# Altium PCB Instigator2012.PcbDoc
Units mil, origin at the board's own origin, x right, y up, seen from the top; angles counter-clockwise.
Board outline 6530 x 4342.03 mil, 4 copper layers (Top Layer, 3.3V, GND, Bottom Layer); 101 components, 105 nets, 515 pads, 160 vias.
Unrouted connection lines stored in the file: 2.
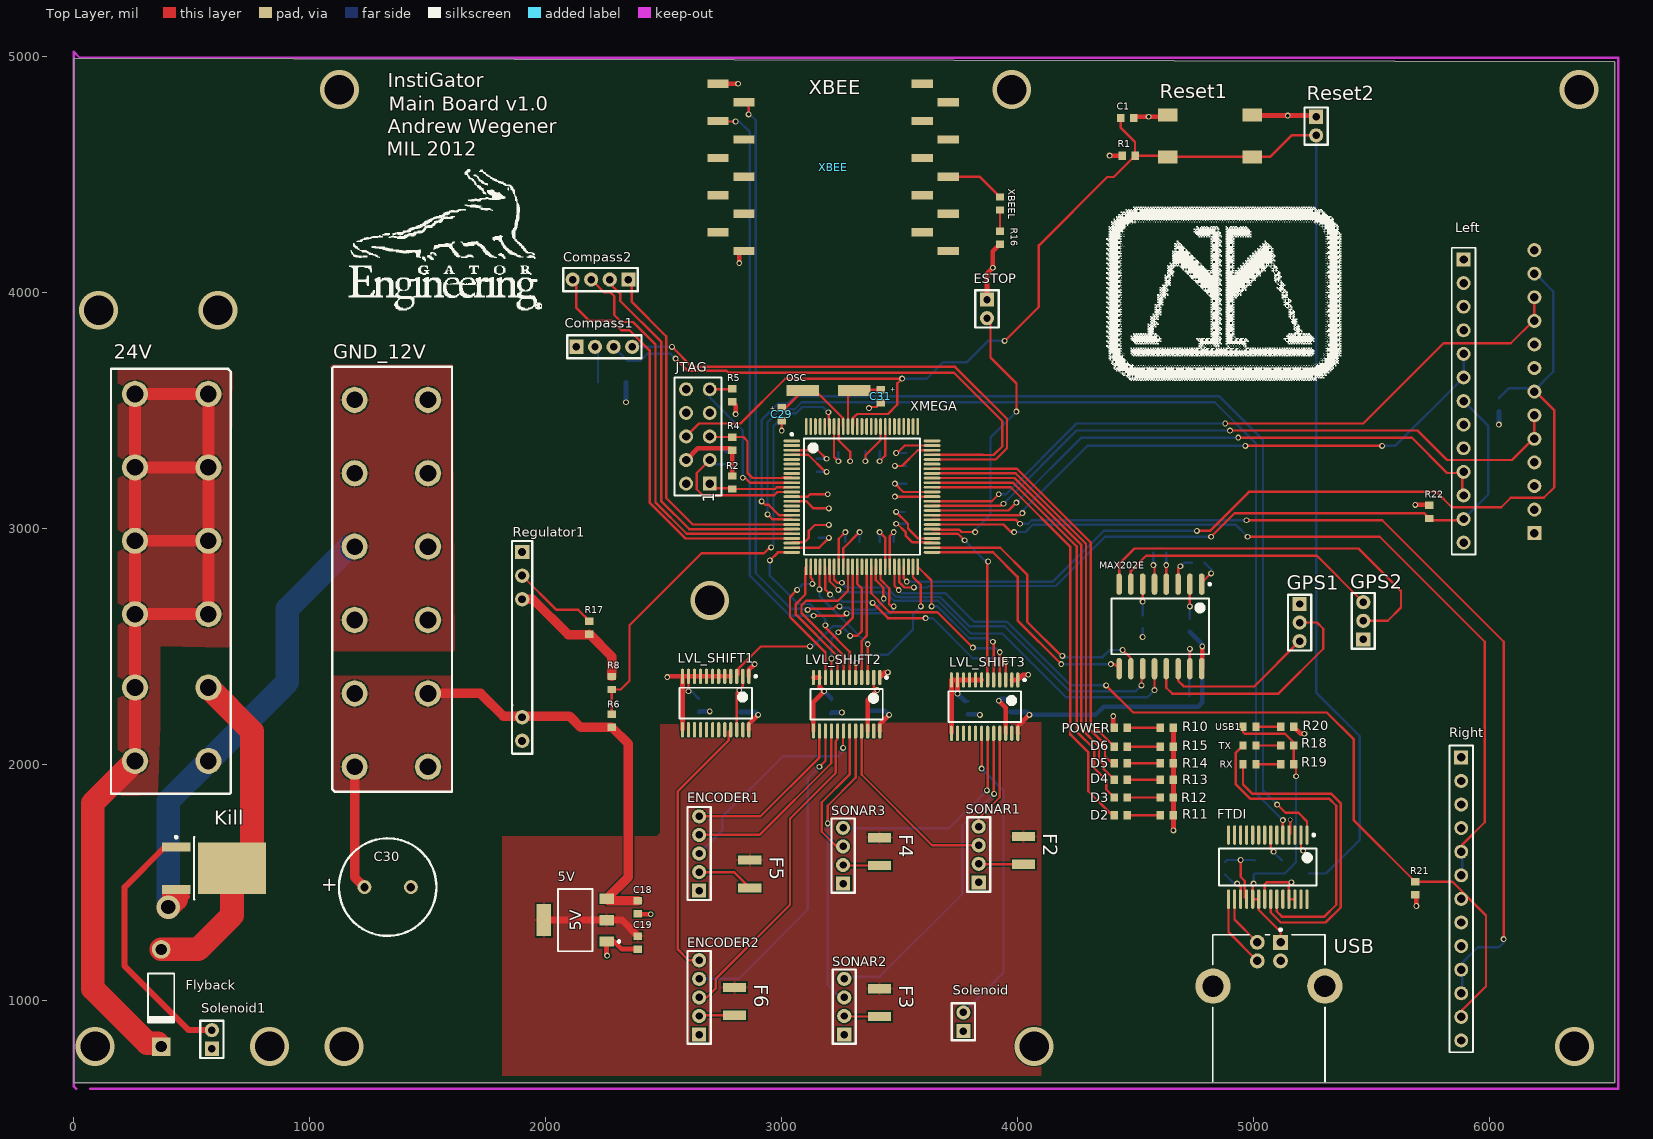
[diagram p0: Top Layer view]
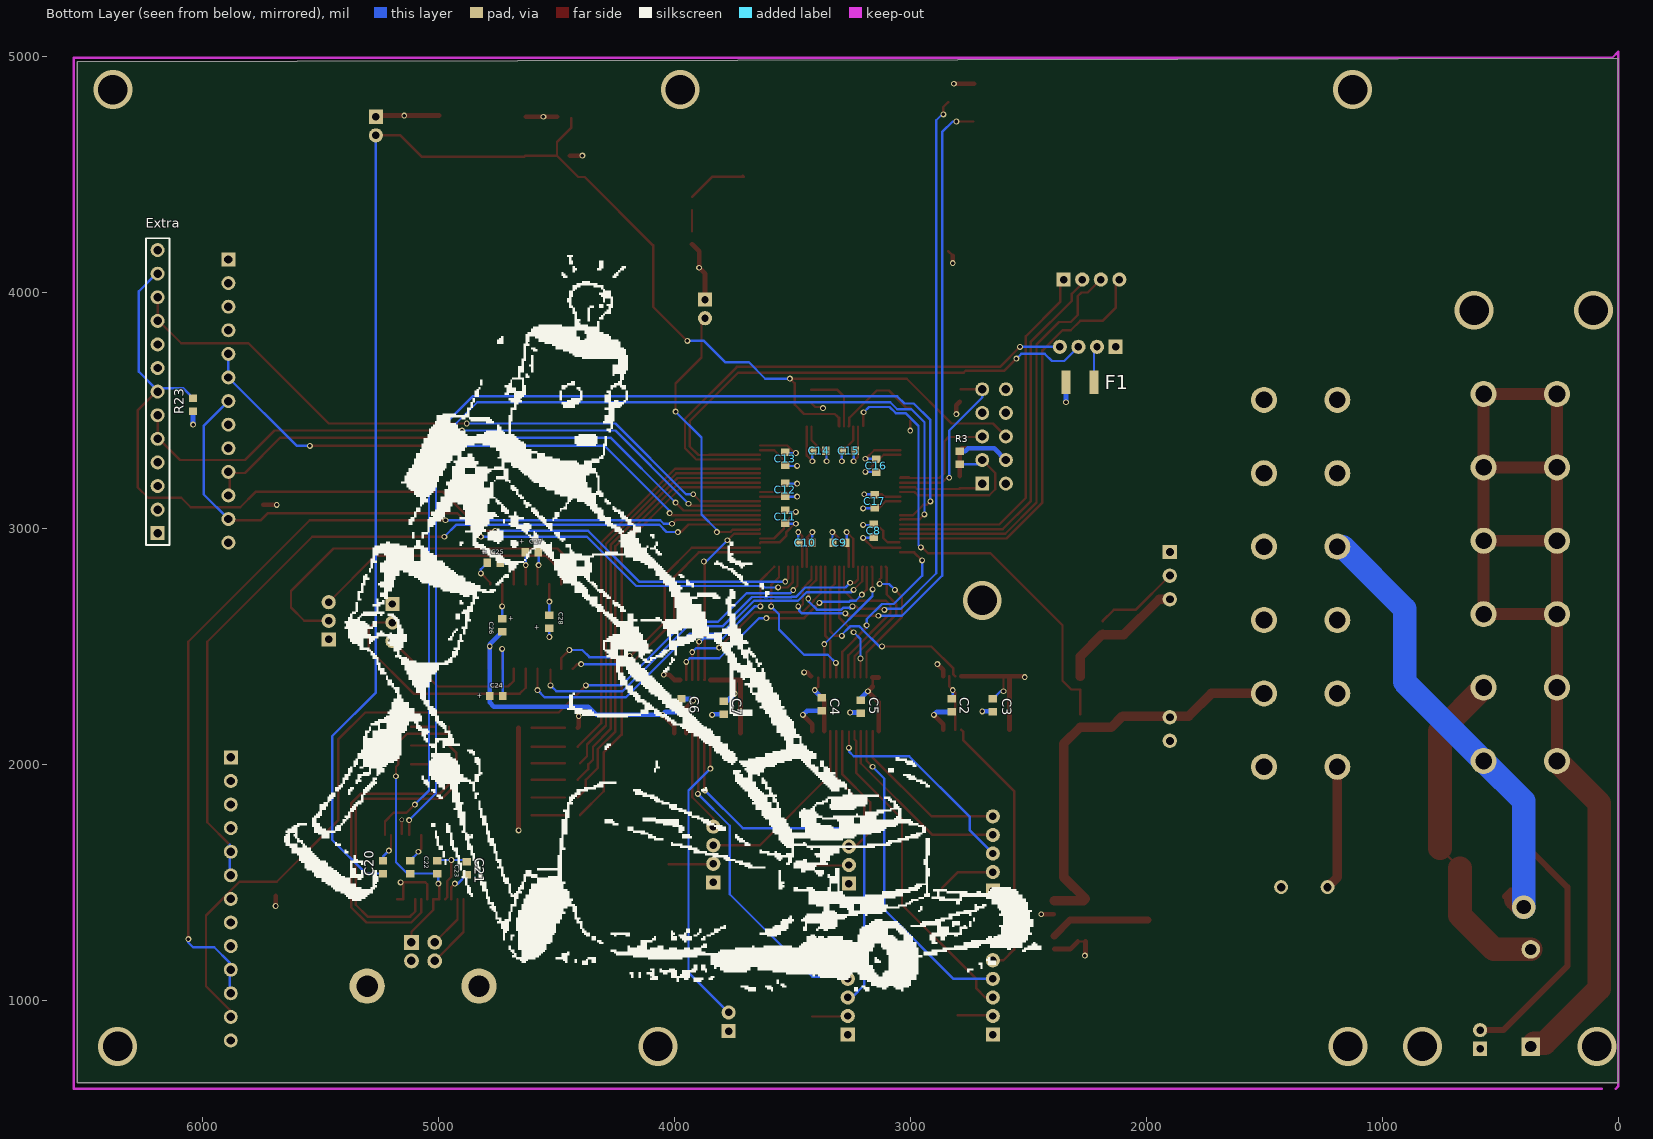
[diagram p1: Bottom Layer view, seen from below]
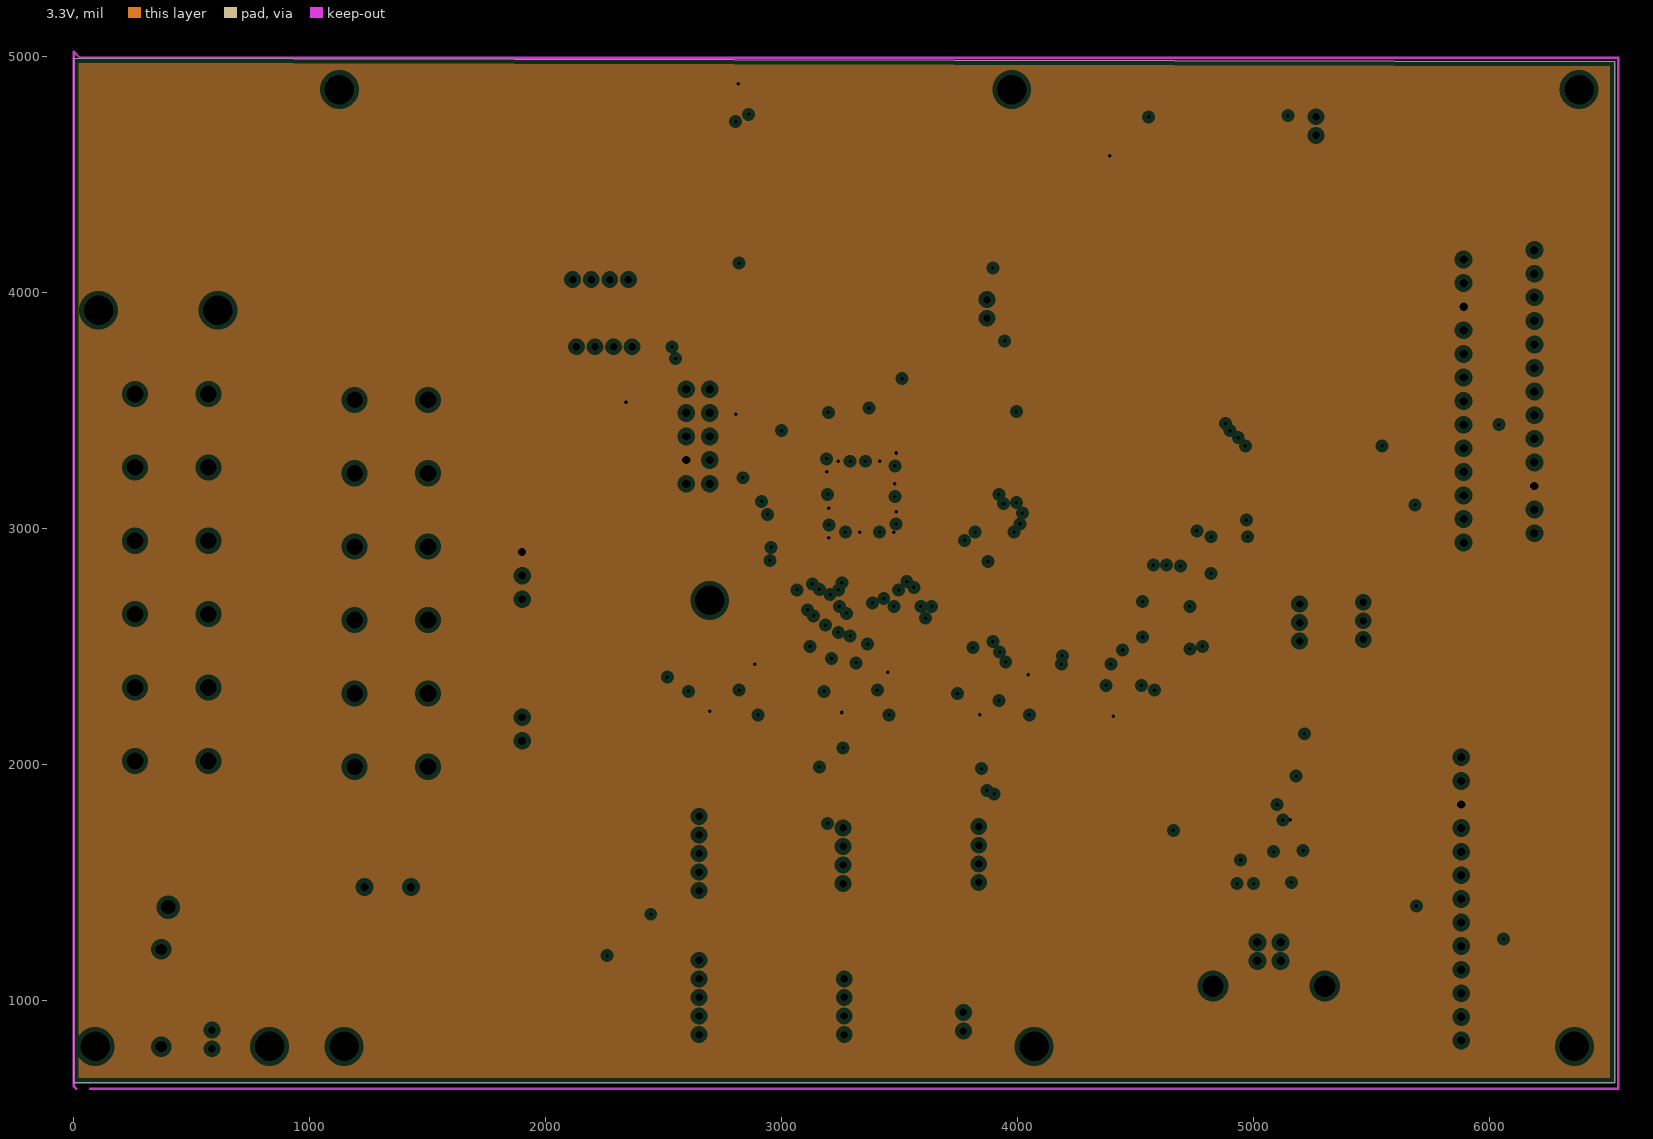
[diagram p2: 3.3V, clearances drawn from the general rule]
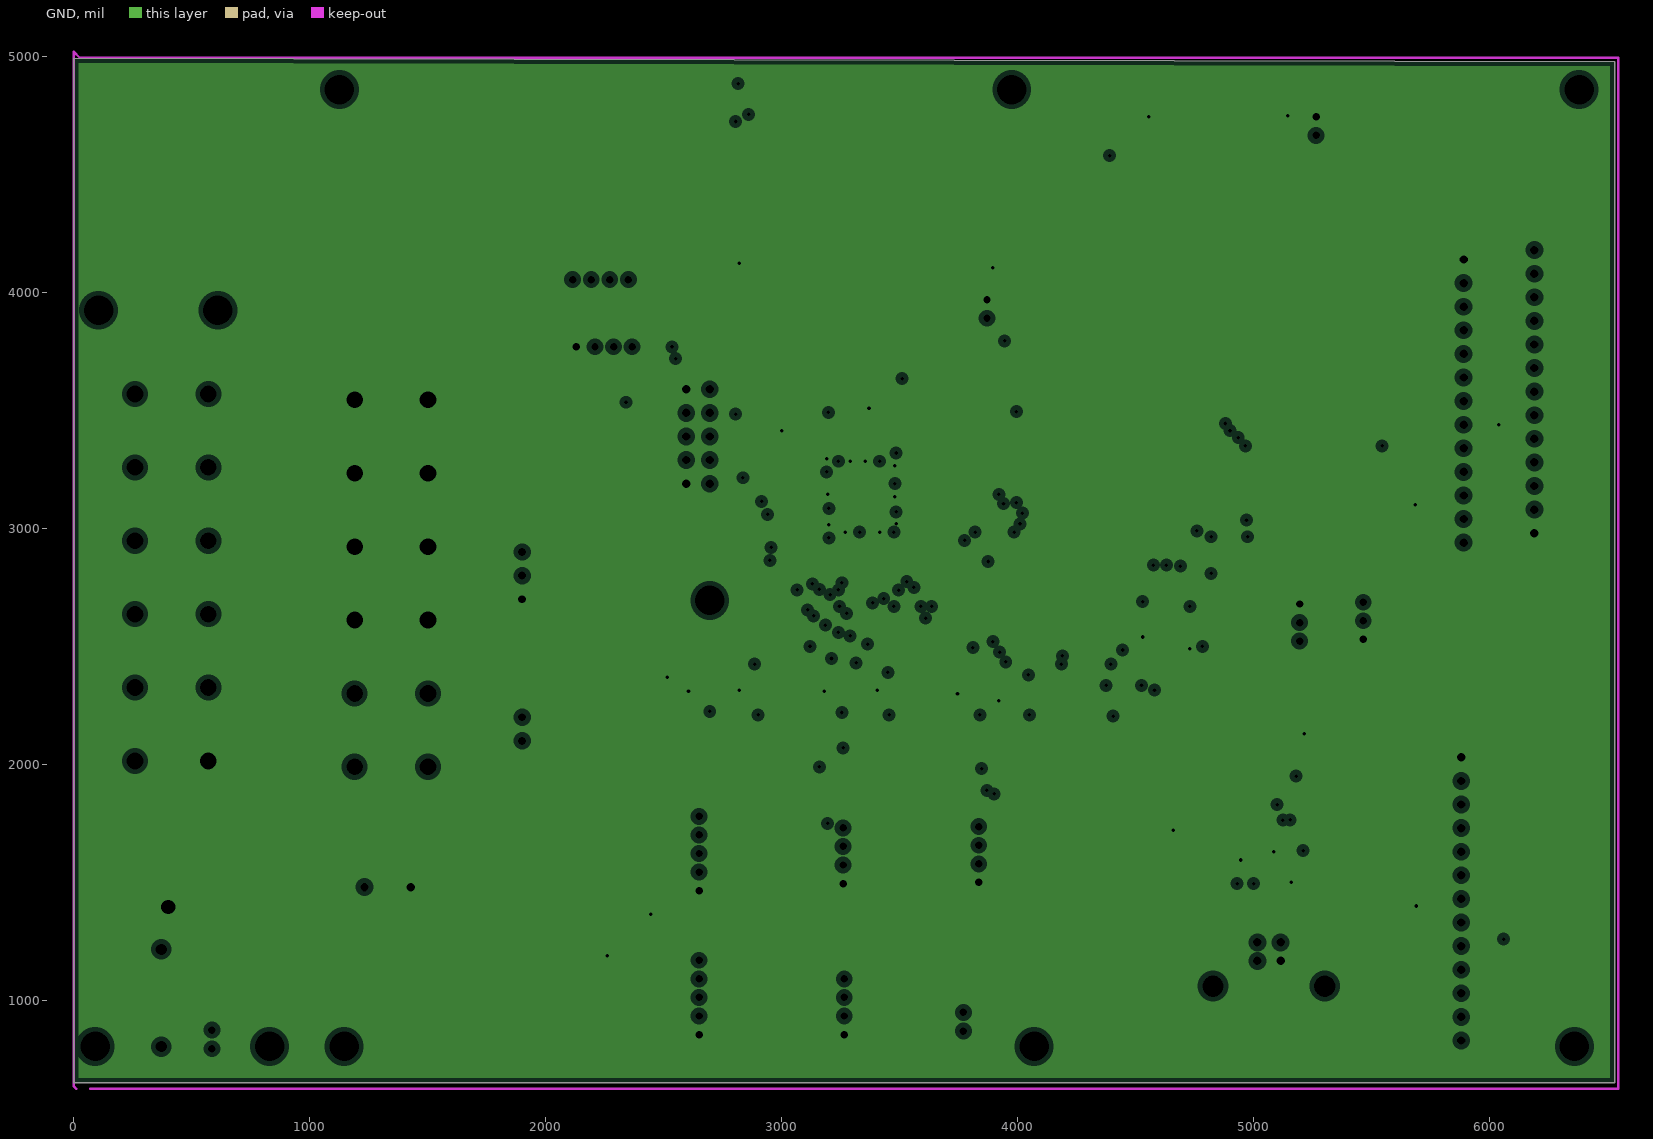
[diagram p3: GND, clearances drawn from the general rule]

## Layer stack, top to bottom
Top Layer: signal copper 1.4
Dielectric: core 12.6, FR-4, Dk 4.8
3.3V: plane copper 1.4, net 3.3V
Dielectric: prepreg 12.6, FR-4, Dk 4.8
GND: plane copper 1.4, net GND
Dielectric: core 12.6, FR-4, Dk 4.8
Bottom Layer: signal copper 1.4

## Board outline
0,650 6530,650 6530,4978.78 0,4992.03

## Design rules (kind name [scope] priority, off if disabled: settings)
Clearance [All] p1: gap=6
ComponentClearance [All] p1: gap=0 collisioncheckmode=3 verticalgap=0 showdistances=FALSE
PlaneClearance [All] p1: clearance=20
PlaneConnect [All] p1: planeconnectstyle=Relief reliefexpansion=20 reliefentries=4 reliefconductorwidth=10 reliefairgap=10
PolygonConnect [All] p1: connectstyle=Relief reliefconductorwidth=10 reliefentries=4 polygonreliefangle="90 Angle"
RoutingVias [All] p1: holewidth=28 width=50 viastyle="Through Hole" minholewidth=15 minwidth=25 maxholewidth=28 maxwidth=50
SilkscreenOverComponentPads [All] p1: minsilkscreentomaskgap=10
SolderMaskExpansion [All] p1: expansion=4
Width [All] p1: maxlimit=150 minlimit=10 preferedwidth=10
24 further rules are at their usual default settings.

## Classes and differential pairs
component class Instigator2012ConnectorSch: C1 C2 C3 C4 C5 C6 C7 Compass1 Compass2 ENCODER1 ENCODER2 ESTOP F1 F2 F3 F4 F5 F6 JTAG LVL_SHIFT1 LVL_SHIFT2 LVL_SHIFT3 R1 R2 R3 R4 R5 R6 R8 Reset1 Reset2 SONAR1 SONAR2 SONAR3
component class Instigator2012ControllerBoard: C8 C9 C10 C11 C12 C13 C14 C15 C16 C17 C29 C31 D2 D3 D4 D5 D6 D7 OSC POWER R10 R11 R12 R13 R14 R15 R16 XBEE XBEEL XMEGA
component class Power_SolenoidKill: 5V 24V C18 C19 C30 Extra Flyback GND_12V Kill R17 R21 R22 R23 Regulator1 Solenoid Solenoid1
component class USB_FTDI: C20 C21 C22 C23 C24 C25 C26 C27 C28 FTDI GPS1 GPS2 MAX202E R18 R19 R20 RX TX USB USB1

## Components (designator, comment, footprint, x,y, rotation, side; value= is the part's Value field where it differs from the comment)
5V "5V Reg" "5V REG" 2125,1340 r90 top
24V "Anderson 12" "PCBComponent_1 - duplicate2" 570,3570 r270 top
C1 "Cap" 1608[0603] 4465,4740 r180 top
C2 "Cap" 1608[0603] 2825,2250 r270 bottom
C3 "Cap" 1608[0603] 2650,2250 r270 bottom
C4 "Cap" 1608[0603] 3375,2255 r270 bottom
C5 "Cap" 1608[0603] 3210,2245 r270 bottom
C6 "Cap" 1608[0603] 3970,2250 r270 bottom
C7 "Cap" 1608[0603] 3790,2240 r270 bottom
C8 "Cap" 1608[0603] 3155,2990 r270 bottom
C9 "Cap" 1608[0603] 3300,2940 r0 bottom
C10 "Cap" 1608[0603] 3445,2940 r0 bottom
C11 "Cap" 1608[0603] 3530,3050 r90 bottom
C12 "Cap" 1608[0603] 3530,3165 r90 bottom
C13 "Cap" 1608[0603] 3530,3295 r90 bottom
C14 "Cap" 1608[0603] 3385,3330 r0 bottom
C15 "Cap" 1608[0603] 3260,3330 r180 bottom
C16 "Cap" 1608[0603] 3145,3265 r270 bottom
C17 "Cap" 1608[0603] 3150,3115 r270 bottom
C18 "Cap" 1608[0603] 2390,1395 r270 top
C19 "Cap" 1608[0603] 2390,1245 r270 top
C20 "Cap" 1608[0603] 5235,1565 r90 bottom
C21 "Cap" 1608[0603] 4880,1560 r270 bottom
C22 "Cap" 1608[0603] 5120,1565 r270 bottom
C23 "Cap" 1608[0603] 5005,1565 r270 bottom
C24 ".1uF" 1608[0603] 4755,2290 r180 bottom
C25 ".1uF" 1608[0603] 4765,2855 r180 bottom
C26 ".1uF" 1608[0603] 4730,2590 r270 bottom
C27 ".1uF" 1608[0603] 4605,2900 r180 bottom
C28 ".1uF" 1608[0603] 4530,2605 r270 bottom
C29 "Cap2" 1608[0603] 3000,3485 r270 top
C30 "Cap Pol1" RB5-10.5 1330,1480 r0 top
C31 "Cap2" 1608[0603] 3420,3560 r270 top
Compass1 "Molex_4Pin" PCBComponent_1#1 2130,3770 r0 top
Compass2 "Molex_4Pin" PCBComponent_1#1 2350,4055 r180 top
D2 "Diode" 1608[0603] 4437.56,1785 r0 top
D3 "Diode" 1608[0603] 4437.56,1860 r0 top
D4 "Diode" 1608[0603] 4437.56,1935 r0 top
D5 "Diode" 1608[0603] 4437.56,2005 r0 top
D6 "Diode" 1608[0603] 4437.56,2075 r0 top
ENCODER1 "Molex_5Pin" PCBComponent_1#2 2650,1465 r90 top
ENCODER2 "Molex_5Pin" PCBComponent_1#2 2650,855 r90 top
ESTOP "Molex_2Pin" PCBComponent_1#3 3870,3970 r270 top
Extra "Header 13" HDR1X13 6190,2980 r90 bottom
F1 "Fuse" "PCBComponent_1 - duplicate" 2320,3620 r180 bottom
F2 "Fuse" "PCBComponent_1 - duplicate" 4025,1675 r270 top
F3 "Fuse" "PCBComponent_1 - duplicate" 3415,1030 r270 top
F4 "Fuse" "PCBComponent_1 - duplicate" 3415,1670 r270 top
F5 "Fuse" "PCBComponent_1 - duplicate" 2865,1575 r270 top
F6 "Fuse" "PCBComponent_1 - duplicate" 2800,1035 r270 top
Flyback "Diode 1N4007" DO-41 370,1010 r270 top
FTDI "FT232RL-Reel" SSOP-28_N 5060,1565 r270 top
GND_12V "Anderson 12" "PCBComponent_1 - duplicate2" 1190,1990 r90 top (schematic designator "POWER IN")
GPS1 "Molex_3Pin" PCBComponent_1#4 5195,2680 r270 top
GPS2 "Molex_3Pin" PCBComponent_1#4 5465,2530 r90 top
JTAG "Header 5X2" HDR2X5 2695,3190 r90 top
Kill "NMOS" TO229P990X239-3N 593.23,1560 r0 top
Left "Header 13" HDR1X13 5890,4140 r270 top
LVL_SHIFT1 "Level Shifter" TSOP65P640X110-24N 2720,2260 r270 top (schematic designator LVL_SHT_IN)
LVL_SHIFT2 "Level Shifter" TSOP65P640X110-24N 3275,2255 r270 top (schematic designator LVL_SHFT_IN1)
LVL_SHIFT3 "Level Shifter" TSOP65P640X110-24N 3860,2245 r270 top (schematic designator LVL_SHFT_OUT)
MAX202E "MAX202" WSO16_N 4605,2585 r270 top (schematic designator U1)
OSC "External Oscillator" "PCBComponent_1 - duplicate3" 3090,3585 r0 top
POWER "Diode" 1608[0603] 4437.56,2155 r0 top (schematic designator D1)
R1 "Res1" 1608[0603] 4470,4580 r180 top
R2 "Res1" 1608[0603] 2790,3195 r90 top
R3 "Res1" 1608[0603] 2790,3300 r90 bottom
R4 "Res1" 1608[0603] 2790,3360 r270 top
R5 "Res1" 1608[0603] 2790,3565 r270 top
R6 "Res1" 1608[0603] 2280,2185 r270 top
R8 "Res1" 1608[0603] 2280,2345 r270 top
R10 "Res1" 1608[0603] 4632.56,2155 r180 top
R11 "Res1" 1608[0603] 4632.56,1785 r180 top
R12 "Res1" 1608[0603] 4632.56,1860 r180 top
R13 "Res1" 1608[0603] 4632.56,1935 r180 top
R14 "Res1" 1608[0603] 4632.56,2005 r180 top
R15 "Res1" 1608[0603] 4632.56,2075 r180 top
R16 "Res1" 1608[0603] 3925,4232.44 r90 top
R17 "Res1" 1608[0603] 2185,2580 r90 top
R18 "Res1" 1608[0603] 5142.56,2080 r0 top
R19 "Res1" 1608[0603] 5142.56,2000 r0 top
R20 "Res1" 1608[0603] 5142.56,2160 r0 top
R21 "Res1" 1608[0603] 5685,1475 r90 top
R22 "Res1" 1608[0603] 5745,3070 r270 top
R23 "Res1" 1608[0603] 6040,3525 r90 bottom
Regulator1 "Regulator" PCBComponent_1#5 1900,2900 r270 top
Reset1 "l" PCBComponent_1#6 4995,4575 r90 top (schematic designator Resest_OnBoard)
Reset2 "Molex_2Pin" PCBComponent_1#3 5265,4745 r270 top (schematic designator Reset_External)
Right "Header 13" HDR1X13 5880,2030 r270 top
RX "Diode" 1608[0603] 4982.56,2000 r180 top (schematic designator RX_LED1)
Solenoid "Molex_2Pin" PCBComponent_1#3 3770,870 r90 top
Solenoid1 "Molex_2Pin" PCBComponent_1#3 585,795 r90 top
SONAR1 "Molex_4Pin" PCBComponent_1#1 3835,1500 r90 top
SONAR2 "Molex_4Pin" PCBComponent_1#1 3265,855 r90 top
SONAR3 "Molex_4Pin" PCBComponent_1#1 3260,1495 r90 top
TX "Diode" 1608[0603] 4982.56,2080 r180 top (schematic designator TX_LED1)
USB "1470156-2" 1470156 5065,655 r270 top (schematic designator USB_B)
USB1 "Diode" 1608[0603] 4982.56,2160 r0 top
XBEE "XBEE_PRO" PCBComponent_1#7 2730,4885 r270 top
XBEEL "Diode" 1608[0603] 3925,4377.44 r270 top
XMEGA "ATXMEGA128A1" TSQFP50P1600X1600X120-100N 3340,3135 r0 top

## Footprints (in the part's own frame and the unit in brackets; to place one, negate y for a bottom-side part, rotate by r counter-clockwise, add the part's x,y. Pads: shape width x height; smd on the part's side, far side on the other; paste and mask are expansions set on the pad)
"5V REG" [mm]
  rect 1.1x1.55 smd: 1(-2.3,-3.375) 2(0,-3.375) 3(2.3,-3.375)
  rect 3.45x1.55 smd: 4(0,3.375)
  silkscreen extent -3.35,-4.83 3.35,1.85
1608[0603] [mm] "Chip Capacitor, Body 1.6x0.8mm, IPC High Density"
  rect 0.8x0.9 smd: 1(-0.7,0) 2(0.7,0)
  body extent -0.87,-0.48 0.87,0.48, height 1.3
1470156 [mm] "Connector; USB1.1, Type B, Thru-Hole; 4 Position; Right Angle"
  rect 1.6x1.6 hole 0.92: 1(-15.01,1.25)
  round 1.6 hole 0.92: 2(-15.01,-1.25) 3(-13.01,-1.25) 4(-13.01,1.25)
  round 3.8 hole 2.3: 5(-10.3,6.02) 6(-10.3,-6.02)
  silkscreen extent -16.48,-6.05 -0.02,6.05
DO-41 [mm] "Diode, Axial; Body 5.2 x 2.7 mm (LxDia. max), Lead Dia. 0.86 mm (max)"
  round 2 hole 1.2: 1(-5.23,0)
  rect 2x2 hole 1.2: 2(5.23,0)
  silkscreen extent -2.65,-1.4 2.75,1.4
HDR1X13 [mm] "Connector; Header; 13 Position"
  rect 1.5x1.5 hole 0.9: 1(0,0)
  round 1.5 hole 0.9: 2(2.54,0) 3(5.08,0) 4(7.62,0) 5(10.16,0) 6(12.7,0) 7(15.24,0) 8(17.78,0) 9(20.32,0) 10(22.86,0) 11(25.4,0) 12(27.94,0) 13(30.48,0)
  silkscreen extent -1.27,-1.27 31.75,1.27
HDR2X5 [mm] "Connector; Header; 5x2 Position"
  rect 1.5x1.5 hole 0.9: 1(0,0)
  round 1.5 hole 0.9: 2(0,2.54) 3(2.54,0) 4(2.54,2.54) 5(5.08,0) 6(5.08,2.54) 7(7.62,0) 8(7.62,2.54) 9(10.16,0) 10(10.16,2.54)
  silkscreen extent -1.27,-1.27 11.43,3.81
PCBComponent_1#1 [mil]
  rect 60x60 hole 31.5: 1(0,0)
  round 60 hole 31.5: 2(78.74,0) 3(157.48,0) 4(236.22,0)
  silkscreen extent -39,-49 276,49
PCBComponent_1#2 [mil]
  rect 60x60 hole 31.5: 1(0,0)
  round 60 hole 31.5: 2(78.74,0) 3(157.48,0) 4(236.22,0) 5(314.96,0)
  silkscreen extent -39,-49 354,49
PCBComponent_1#3 [mil]
  rect 60x60 hole 31.5: 1(0,0)
  round 60 hole 31.5: 2(78.74,0)
  silkscreen extent -39,-49 118,49
PCBComponent_1#4 [mil]
  rect 60x60 hole 31.5: 1(0,0)
  round 60 hole 31.5: 2(78.74,0) 3(157.48,0)
  silkscreen extent -39,-49 197,49
PCBComponent_1#5 [mil]
  rect 60.63x60.63 hole 33.46: 1(0,0)
  round 60.63 hole 33.46: 2(100,0) 3(200,0) 4(700,0) 5(800,0)
  silkscreen extent -47,-43 855,43
PCBComponent_1#6 [mil]
  rect 55.12x82.68 smd: 1(177.56,358.27) 1(177.56,0) 3(0,358.27) 3(0,0)
PCBComponent_1#7 [mil]
  rect 35.04x90.16 smd: 1(0,0) 2(78.74,109.84) 3(157.48,0) 4(236.22,109.84) 5(314.96,0) 6(393.7,109.84) 7(472.44,0) 8(551.18,109.84) 9(629.92,0) 10(708.66,109.84) 11(708.66,975.98) 12(629.92,866.14) 13(551.18,975.98) 14(472.44,866.14) 15(393.7,975.98) 16(314.96,866.14) 17(236.22,975.98) 18(157.48,866.14) 19(78.74,975.98) 20(0,866.14)
"PCBComponent_1 - duplicate" [mm]
  rect 1x2.5 smd: 1(-0.5,0) 2(2.5,0)
"PCBComponent_1 - duplicate2" [mm]
  round 2.8 hole 1.8: 1(0,0) 2(7.9,0) 3(15.8,0) 4(23.7,0) 5(31.6,0) 6(39.5,0) 7(0,-7.9) 8(7.9,-7.9) 9(15.8,-7.9) 10(23.7,-7.9) 11(31.6,-7.9) 12(39.5,-7.9)
  silkscreen extent -2.7,-10.48 43.05,2.42
"PCBComponent_1 - duplicate3" [mm]
  rect 3.5x1.2 smd: 1(0,0) 2(5.5,0)
RB5-10.5 [mm] "Capacitor (Radial); 2 Leads"
  round 1.5 hole 0.9: 1(-2.5,0) 2(2.5,0)
  silkscreen extent -5.25,-5.25 5.25,5.25
SSOP-28_N [mm] "SOP, 28-Leads, Body 10.2x5.3mm, Pitch 0.65mm, IPC Medium Density"
  oval 2.1x0.35 smd: 1(-3.45,4.225) 2(-3.45,3.575) 3(-3.45,2.925) 4(-3.45,2.275) 5(-3.45,1.625) 6(-3.45,0.975) 7(-3.45,0.325) 8(-3.45,-0.325) 9(-3.45,-0.975) 10(-3.45,-1.625) 11(-3.45,-2.275) 12(-3.45,-2.925) 13(-3.45,-3.575) 14(-3.45,-4.225) 15(3.45,-4.225) 16(3.45,-3.575) 17(3.45,-2.925) 18(3.45,-2.275) 19(3.45,-1.625) 20(3.45,-0.975) 21(3.45,-0.325) 22(3.45,0.325) 23(3.45,0.975) 24(3.45,1.625) 25(3.45,2.275) 26(3.45,2.925) 27(3.45,3.575) 28(3.45,4.225)
  silkscreen extent -3.57,-5.25 2,5.25, body extent -2.8,-5.25 2.8,5.25, height 2
TO229P990X239-3N [mm] "D-PAK, 3-Pads, Body 6.2x6.7mm (max), IPC Medium Density"
  rect 3.05x1 smd: 1(-4.05,2.29) 3(-4.05,-2.29)
  rect 7.3x5.55 smd: 2(1.95,0)
  silkscreen extent -4.17,-3.35 -2.1,3.46, body extent -2.15,-3.37 4.07,3.37, height 2.39
TSOP65P640X110-24N [mm] "TSOP, 24-Leads, Body 7.8x4.4mm (max), Pitch 0.65mm, IPC Medium Density"
  oval 1.65x0.35 smd: 1(-2.875,3.575) 2(-2.875,2.925) 3(-2.875,2.275) 4(-2.875,1.625) 5(-2.875,0.975) 6(-2.875,0.325) 7(-2.875,-0.325) 8(-2.875,-0.975) 9(-2.875,-1.625) 10(-2.875,-2.275) 11(-2.875,-2.925) 12(-2.875,-3.575) 13(2.875,-3.575) 14(2.875,-2.925) 15(2.875,-2.275) 16(2.875,-1.625) 17(2.875,-0.975) 18(2.875,-0.325) 19(2.875,0.325) 20(2.875,0.975) 21(2.875,1.625) 22(2.875,2.275) 23(2.875,2.925) 24(2.875,3.575)
  silkscreen extent -3,-3.9 1.65,4.43, body extent -2.2,-3.9 2.2,3.9, height 1.1
TSQFP50P1600X1600X120-100N [mm] "TSQFP, 100-Leads, Body 16.3x16.3mm (max), Pitch 0.50mm, IPC Medium Density"
  oval 1.8x0.3 smd: 1(-7.55,6) 2(-7.55,5.5) 3(-7.55,5) 4(-7.55,4.5) 5(-7.55,4) 6(-7.55,3.5) 7(-7.55,3) 8(-7.55,2.5) 9(-7.55,2) 10(-7.55,1.5) 11(-7.55,1) 12(-7.55,0.5) 13(-7.55,0) 14(-7.55,-0.5) 15(-7.55,-1) 16(-7.55,-1.5) 17(-7.55,-2) 18(-7.55,-2.5) 19(-7.55,-3) 20(-7.55,-3.5) 21(-7.55,-4) 22(-7.55,-4.5) 23(-7.55,-5) 24(-7.55,-5.5) 25(-7.55,-6) 51(7.55,-6) 52(7.55,-5.5) 53(7.55,-5) 54(7.55,-4.5) 55(7.55,-4) 56(7.55,-3.5) 57(7.55,-3) 58(7.55,-2.5) 59(7.55,-2) 60(7.55,-1.5) 61(7.55,-1) 62(7.55,-0.5) 63(7.55,0) 64(7.55,0.5) 65(7.55,1) 66(7.55,1.5) 67(7.55,2) 68(7.55,2.5) 69(7.55,3) 70(7.55,3.5) 71(7.55,4) 72(7.55,4.5) 73(7.55,5) 74(7.55,5.5) 75(7.55,6)
  oval 0.3x1.8 smd: 26(-6,-7.55) 27(-5.5,-7.55) 28(-5,-7.55) 29(-4.5,-7.55) 30(-4,-7.55) 31(-3.5,-7.55) 32(-3,-7.55) 33(-2.5,-7.55) 34(-2,-7.55) 35(-1.5,-7.55) 36(-1,-7.55) 37(-0.5,-7.55) 38(0,-7.55) 39(0.5,-7.55) 40(1,-7.55) 41(1.5,-7.55) 42(2,-7.55) 43(2.5,-7.55) 44(3,-7.55) 45(3.5,-7.55) 46(4,-7.55) 47(4.5,-7.55) 48(5,-7.55) 49(5.5,-7.55) 50(6,-7.55) 76(6,7.55) 77(5.5,7.55) 78(5,7.55) 79(4.5,7.55) 80(4,7.55) 81(3.5,7.55) 82(3,7.55) 83(2.5,7.55) 84(2,7.55) 85(1.5,7.55) 86(1,7.55) 87(0.5,7.55) 88(0,7.55) 89(-0.5,7.55) 90(-1,7.55) 91(-1.5,7.55) 92(-2,7.55) 93(-2.5,7.55) 94(-3,7.55) 95(-3.5,7.55) 96(-4,7.55) 97(-4.5,7.55) 98(-5,7.55) 99(-5.5,7.55) 100(-6,7.55)
  silkscreen extent -7.67,-6.25 6.25,6.82, body extent -7,-7 7,7, height 1.2
WSO16_N [mm] "SOIC, 16-Leads, Body 10.3x7.5mm, Pitch 1.27mm, IPC Medium Density"
  oval 2.3x0.6 smd: 1(-4.55,4.445) 2(-4.55,3.175) 3(-4.55,1.905) 4(-4.55,0.635) 5(-4.55,-0.635) 6(-4.55,-1.905) 7(-4.55,-3.175) 8(-4.55,-4.445) 9(4.55,-4.445) 10(4.55,-3.175) 11(4.55,-1.905) 12(4.55,-0.635) 13(4.55,0.635) 14(4.55,1.905) 15(4.55,3.175) 16(4.55,4.445)
  silkscreen extent -4.67,-5.25 3,5.42

## Part data
5V: "5V Linear Reg, 1.5A (Digi-Key: ADP3339AKCZ-5-R7CT-ND)"
C1 C2 C3 C4 C5 C6 C7 C8 C9 C10 C11 C12 C13 C14 C15 C16 C17 C18 C19 C20 C21 C22 C23 C29 C31: "Capacitor"
C24 C25 C26 C27 C28: library part "0805 Cap"
C30: "Polarized Capacitor (Radial)"
D2 D3 D4 D5 D6 POWER RX TX USB1 XBEEL: "Default Diode"
Extra Left Right: "Header, 13-Pin"
Flyback: "1 Amp General Purpose Rectifier"
FTDI: "USB UART Asynchronous Serial Data Transfer Chip, SSOP-28, Tape and Reel"
JTAG: "Header, 5-Pin, Dual row"
MAX202E: library part MAX202CWE, "+5V RS-232 Transceiver with 0.1µF External Capacitor (Digi-Key#: MAX202CWE+-ND)"
R1 R2 R3 R4 R5 R6 R8 R10 R11 R12 R13 R14 R15 R16 R17 R18 R19 R20 R21 R22 R23: "Resistor"
Reset1: library part Component_1
USB: "USB 1.1, Right Angle, Thru-Hole, B Type, Receptacle, 4 Position, Black"
XBEE: library part XBEE

## Via types
v1: diameter 25, hole 15, Top Layer to Bottom Layer, 146 vias
v2: diameter 165, hole 125, Top Layer to Bottom Layer, 11 vias
v3: diameter 20, hole 15, Top Layer to Bottom Layer, 1 vias
v4: diameter 24, hole 15, Top Layer to Bottom Layer, 1 vias
v5: diameter 100, hole 60, Top Layer to Bottom Layer, 1 vias

## Nets (pads, with @x,y where several pads share a name; then routed paths per layer and width w, separated by ;. In a path a pad name is that pad's centre, name@x,y a point inside that pad or via, vN(x,y) a via of type N, cw(c..) or ccw(c..) an arc to the next point about the centre after c; other vN are vias at no path point)
3.3V: C3.2 C5.2 C7.2 C8.2 C9.2 C10.2 C11.2 C12.2 C13.2 C14.2 C15.2 C16.2 C17.2 Extra.3 F1.1 FTDI.4 JTAG.4 Left.3 LVL_SHIFT1.1 LVL_SHIFT2.1 LVL_SHIFT3.1 LVL_SHIFT3.2 POWER.1 R1.2 R2.2 R3.2 R4.2 R5.2 Regulator1.1 Right.3 XBEE.1 XMEGA.4 XMEGA.14 XMEGA.24 XMEGA.34 XMEGA.44 XMEGA.54 XMEGA.64 XMEGA.74 XMEGA.83 XMEGA.94 | length 3396.1
  Top Layer w10: XMEGA.24 3158.46,2918.46 v1(3200,2960) ; XMEGA.14 3104.68,3115.32 3135,3085 v1(3200,3085) ; XMEGA.4 3112.83,3312.17 3185,3240 v1(3190,3240) ; XMEGA.94 3221.89,3303.11 v1(3240,3285) ; XMEGA.34 3261.26,2916.26 v1(3330,2985) ; v1(3415,3285) 3438.43,3308.43 XMEGA.83 ; XMEGA.44 3458.11,2968.11 v1(3475,2985) ; v1(3480,3190) 3515.31,3154.69 XMEGA.64 ; v1(3485,3070) 3535,3020 3535,3000 3577.17,2957.83 XMEGA.54 ; v1(3485,3320) 3490,3320 3521.54,3351.54 XMEGA.74 ; FTDI.4@5155,1706.26 v3(5155,1765)
  Top Layer w20: JTAG.4 2645,3340 2782.44,3340 R4.2 R2.2 ; XBEE.1 v1(2815,4885) ; R5.2 2805,3522.44 v1(2805,3485) ; LVL_SHIFT1.1 2860.75,2400.75 v1(2885,2425) ; LVL_SHIFT2.1@3421.28,2373.72 3437.56,2390 v1(3450,2390) ; LVL_SHIFT3.2 LVL_SHIFT3.1 4022.56,2380 v1(4045,2380) ; v1(4390,4580) R1.2 ; v1(4405,2205) 4405,2160 POWER.1
  Bottom Layer w10: C16.2@3147.56,3240 v1(3190,3240) ; C17.2@3152.44,3085 v1(3200,3085) ; C8.2@3157.44,2960 v1(3200,2960) ; v1(3240,3285) C15.2@3240,3322.44 ; C9.2@3330,2942.44 v1(3330,2985) ; v1(3415,3285) C14.2@3415,3327.56 ; C10.2@3475,2942.44 v1(3475,2985) ; v1(3480,3190) C12.2@3527.44,3190 ; v1(3485,3070) C11.2@3522.44,3070 ; v1(3485,3320) C13.2@3527.44,3320
  Bottom Layer w20: v1(2340,3535) F1.1@2340,3619.68 ; JTAG.4 2645,3340 2755,3340 2767.44,3327.56 R3.2 ; C3.2 2652.56,2225 v1(2695,2225) ; C5.2 3212.56,2220 v1(3255,2220) ; C7.2 3837.56,2212.44 v1(3840,2210)
5V: 5V.2 5V.4 C2.2 C4.2 C6.2 C19.1 C24.1 C26.2 F2.1 F3.1 F4.1 F5.1 F6.1 LVL_SHIFT1.24 LVL_SHIFT2.24 LVL_SHIFT3.24 MAX202E.16 | length 2108.4
  Top Layer w20: LVL_SHIFT1.24 2860.75,2170.75 v1(2900,2210) ; LVL_SHIFT2.24 3415.75,2170.75 v1(3455,2210) ; LVL_SHIFT3.24 4000.75,2160.75 v1(4050,2210) ; MAX202E.16@4782.56,2408.42 v1(4782.56,2500)
  Top Layer w30: 5V.4 5V.2 2322.56,1340 C19.1
  Bottom Layer w20: C2.2 2887.56,2222.44 v1(2900,2210) ; C4.2 3437.56,2227.44 v1(3455,2210) ; C6.2 4037.56,2222.44 v1(4050,2210) 4330,2210 4365,2245 4765,2245 4782.56,2262.56 C24.1 v1(4782.56,2500) 4782.56,2509.88 C26.2
12V: 5V.3 C18.1 C30.1 GND_12V.1 GND_12V.2 GND_12V.7 GND_12V.8 R6.2 Regulator1.4 | length 2295.2
  Top Layer w40: GND_12V.1 1190,1521.57 C30.1 ; GND_12V.8 1723.98,2301.02 1820,2205 2050,2205 2100,2205 2147.56,2157.44 R6.2 2350,2087.44 2350,1522.68 5V.3 2265.87,1422.56 C18.1
12V_BATTERY: R6.1 R8.2 XMEGA.95 | length 2021
  Top Layer w10: R6.1 R8.2 2317.44,2317.44 2355,2355 2355,2590 2660,2895 2925,2895 2952.5,2922.5 v1(2955,2920) ; v1(3197.5,3492.5) 3199.43,3490.57 XMEGA.95@3199.43,3435.02
  Bottom Layer w10: v1(2955,2920) 2965,2930 2965,3434 3020,3489 3061.63,3489 3087.63,3515 3175,3515 v1(3197.5,3492.5)
24V: 24V.1 24V.2 24V.3 24V.4 24V.7 24V.8 24V.9 24V.10 24V.11 24V.12 Flyback.2 | length 5141.9
  Top Layer w50: 24V.12 24V.11 24V.10 ; 24V.10 24V.4 24V.3 ; 24V.10 24V.9 ; 24V.9 24V.3 ; 24V.9 24V.8 ; 24V.8 24V.2 ; 24V.8 24V.7 24V.1 24V.2 ; 24V.3 24V.2
  Top Layer w100: 24V.12 80,1835.91 80,1050 310.91,819.09 Flyback.2@355,819.09
A1: LVL_SHIFT2.6 XMEGA.25 | length 792.8
  Top Layer w10: v1(2950,2865) 2983.78,2898.78 XMEGA.25 ; v1(3185,2590) 3185,2580 3287.8,2477.2 LVL_SHIFT2.6
  Bottom Layer w10: v1(2950,2865) 2950,2800 3070,2680 3120,2680 3185,2615 3185,2580 v1(3185,2590)
A2: LVL_SHIFT2.7 XMEGA.35 | length 704.2
  Top Layer w10: LVL_SHIFT2.7 3262.2,2462.8 3083.81,2641.19 3083.81,2673.81 3103.5,2693.5 3238.5,2693.5 3280.94,2735.94 XMEGA.35
B1: LVL_SHIFT2.8 XMEGA.26 | length 560.9
  Top Layer w10: XMEGA.26 3100,2833.98 3100,2720 3060,2680 3060,2635 3236.61,2458.39 LVL_SHIFT2.8
B2: LVL_SHIFT2.9 XMEGA.36 | length 506.7
  Top Layer w10: LVL_SHIFT2.9 v1(3211.02,2448.98) ; v1(3240,2560) 3300.63,2620.63 XMEGA.36
  Bottom Layer w10: v1(3211.02,2448.98) 3211.02,2531.02 v1(3240,2560)
CHA1: ENCODER1.3 LVL_SHIFT2.18 | length 907.5
  Top Layer w10: v1(3260,2070) LVL_SHIFT2.18@3260,2139.61
  Bottom Layer w10: ENCODER1.3 2747.52,1720 2747.52,1777.52 3005,2035 3240,2035 3260,2055 v1(3260,2070)
CHA2: ENCODER2.3 LVL_SHIFT2.17 | length 1391.3
  Top Layer w10: ENCODER2.3 2682.48,1012.48 2720,1050 2720,1090 3035,1405 3035,1770 3228.91,1963.91 3228.91,2098.91 3236.61,2106.61 LVL_SHIFT2.17
CHB1: ENCODER1.4 LVL_SHIFT2.16 | length 823.1
  Top Layer w10: ENCODER1.4 2906.22,1701.22 3210,2005 3210,2140.79 LVL_SHIFT2.16
CHB2: ENCODER2.4 LVL_SHIFT2.15 | length 1369.7
  Top Layer w10: v1(3160,1990) 3185.43,2015.43 LVL_SHIFT2.15
  Bottom Layer w10: ENCODER2.4 2816.22,1091.22 3110,1385 3110,1940 v1(3160,1990)
DEBUG0: D2.1 XMEGA.65 | length 1902
  Top Layer w10: XMEGA.65 3970.63,3174.37 4223.69,2921.31 4223.69,2126.31 4300,2050 4300,1885 ; 4299,1886 D2.1@4400,1785
DEBUG1: D3.1 XMEGA.66 | length 1855.5
  Top Layer w10: XMEGA.66 3980.94,3194.06 4250,2925 4250,2140 4325,2065 4325,1985 4375,1935 4375,1895 D3.1
DEBUG2: D4.1 XMEGA.67 | length 1803.3
  Top Layer w10: XMEGA.67 3986.26,3213.74 4270,2930 4270,2150 4345,2075 4345,2020 4365,2000 4365,1980 D4.1
DEBUG3: D5.1 XMEGA.68 | length 1751.9
  Top Layer w10: XMEGA.68 3991.57,3233.43 4290,2935 4290,2165 4370,2085 4370,2035 D5.1@4400,2005
DEBUG4: D6.1 XMEGA.69 | length 1708.9
  Top Layer w10: XMEGA.69 3996.89,3253.11 4310,2940 4310,2175 D6.1
DIN_XBEE: XBEE.3 XMEGA.42 | length 2934.6
  Top Layer w10: XBEE.3@2732.52,4725 v1(2805,4725) ; v1(3135,2630) 3265,2630 v1(3275,2640) ; XMEGA.42 3418.74,2783.89 3456,2746.63 3456,2692.77 3455,2691.77 3455,2680 3465,2670 v1(3475,2670)
  Bottom Layer w10: v1(2805,4725) 2820,4725 2865,4680 2865,2800 3035,2630 v1(3135,2630) ; v1(3275,2640) 3460,2640 3470,2650 3470,2665 v1(3475,2670)
DOUT_XBEE: XBEE.2 XMEGA.41 | length 2825.2
  Top Layer w10: XBEE.2 2860,4786.1 v1(2860,4755) ; v1@3105,2660 3220,2660 3230,2670 v1(3245,2670) ; XMEGA.41 3399.06,2780.94 3430,2750 3430,2705 v1(3432.5,2702.5)
  Bottom Layer w10: v1@2862.5,4757.5 2890,4730 2890,2810 3040,2660 v1@3105,2660 ; v1(3245,2670) 3255,2660 3258.5,2663.5 3284.73,2663.5 3292.23,2656 3396,2656 3430,2690 3430,2710 3432.5,2707.5 v1(3432.5,2702.5)
  other v1: 3110,2655
DREADY: Compass1.4 XMEGA.71 | length 2170.5
  Top Layer w10: v1(2535,3770) 2620,3685 3735,3685 3955,3465 3955,3340 3912.48,3297.48 ; XMEGA.71 3907.48,3292.48
  Bottom Layer w10: Compass1.4 v1(2535,3770)
EC1: LVL_SHIFT2.3 XMEGA.29 | length 555.5
  Top Layer w10: v1@3160.06,2742.07 3160.06,2834.98 XMEGA.29 ; LVL_SHIFT2.3 v1(3364.57,2509.57)
  Bottom Layer w10: v1(3160,2742.07) 3160,2714.13 v1(3364.57,2509.57)
EC2: LVL_SHIFT2.4 XMEGA.39 | length 478.1
  Top Layer w10: LVL_SHIFT2.4 3338.98,2523.98 3359.69,2544.69 XMEGA.39
EC3: LVL_SHIFT2.5 XMEGA.49 | length 654.3
  Top Layer w10: LVL_SHIFT2.5 v1@3313.39,2428.39 ; XMEGA.49 3556.54,2793.46 3590,2760 v1(3590,2670)
  Bottom Layer w10: v1(3315,2430) 3350,2465 3450,2465 3556.54,2571.54 3556.54,2636.54 v1(3590,2670)
ECHO1: LVL_SHIFT2.21 SONAR1.3 | length 805.5
  Top Layer w10: LVL_SHIFT2.21 3338.98,1956.02 3637.52,1657.48 SONAR1.3
ECHO2: LVL_SHIFT2.20 SONAR2.3 | length 1217.6
  Top Layer w10: v1(3195,1750) 3195,1825 3313.39,1943.39 LVL_SHIFT2.20
  Bottom Layer w10: v1(3195,1750) 3195,1065 3247.52,1012.48 SONAR2.3
ECHO3: LVL_SHIFT2.19 SONAR3.3 | length 591.5
  Top Layer w10: SONAR3.3 3232.52,1652.48 3170,1715 3170,1840 3287.8,1957.8 LVL_SHIFT2.19
ESTOP: ESTOP.2 XMEGA.56 | length 1250.5
  Top Layer w10: XMEGA.56 3640.02,2994.43 3753.2,2994.43 3762.63,2985 3829.41,2985 3820,2994.41 v1(3820,2985) ; ESTOP.2 3885,3876.26 3885,3725 3995,3615 v1(3995,3495)
  Bottom Layer w10: v1(3820,2985) 3820,2994.41 3885,3059.41 3885,3385 v1(3995,3495)
EXTRA_INA: Extra.5 Extra.6 XMEGA.61 | length 2869.1
  Top Layer w10: XMEGA.61 3930.63,3095.63 v1(3940,3105) ; v1(4900,3415) 5695,3415 5820,3290 6095,3290 6190,3385 Extra.6@6190,3485
  Bottom Layer w10: v1@3945,3110 4250,3415 v1(4900,3415)
EXTRA_INB: Extra.10 Extra.11 XMEGA.62 | length 2992.8
  Top Layer w10: XMEGA.62 3890.32,3115.32 v1(3920,3145) ; v1(4880,3445) 5465,3445 5805,3785 6090,3785 Extra.10@6190,3885 ; Extra.10@6175,3900 Extra.10@6190,3885 ; Extra.11@6190,3985 Extra.10@6190,3885
  Bottom Layer w10: v1(3920,3145) 3950,3145 4250,3445 v1(4880,3445)
EXTRA_PWM: Extra.7 Extra.12 R23.2 XMEGA.47 | length 4215.8
  Top Layer w10: XMEGA.47 3517.17,2787.83 v1(3530,2775) ; v1(4760,2990) 4815,2990 4980,3155 5775,3155 5840,3090 6050,3090 6090,3130 6230,3130 6275,3175 6275,3500 Extra.7@6190,3585
  Bottom Layer w10: v1(3530,2775) 4150,2775 4365,2990 v1(4760,2990) ; R23.2 6082.44,3595 6180,3595 6190,3585 6270,3665 6270,4005 Extra.12@6190,4085
GND: 5V.1 24V.6 C1.1 C2.1 C3.1 C4.1 C5.1 C6.1 C7.1 C8.1 C9.1 C10.1 C11.1 C12.1 C13.1 C14.1 C15.1 C16.1 C17.1 C18.2 C19.2 C21.1 C22.1 C23.1 C24.2 C28.2 C29.2 C30.2 C31.2 Compass1.1 ENCODER1.1 ENCODER2.1 ESTOP.1 Extra.1 FTDI.7 FTDI.18 FTDI.21 FTDI.25 FTDI.26 GND_12V.3 GND_12V.4 GND_12V.5 GND_12V.6 GND_12V.9 GND_12V.10 GND_12V.11 GND_12V.12 GPS1.1 GPS2.1 JTAG.2 JTAG.10 Kill.3 Left.1 LVL_SHIFT1.2 LVL_SHIFT1.4 LVL_SHIFT1.5 LVL_SHIFT1.6 LVL_SHIFT1.7 LVL_SHIFT1.8 LVL_SHIFT1.9 LVL_SHIFT1.10 LVL_SHIFT1.11 LVL_SHIFT1.12 LVL_SHIFT1.13 LVL_SHIFT1.22 LVL_SHIFT2.2 LVL_SHIFT2.11 LVL_SHIFT2.12 LVL_SHIFT2.13 LVL_SHIFT2.22 LVL_SHIFT3.7 LVL_SHIFT3.8 LVL_SHIFT3.9 LVL_SHIFT3.10 LVL_SHIFT3.11 LVL_SHIFT3.12 LVL_SHIFT3.13 LVL_SHIFT3.22 MAX202E.15 R8.1 R10.1 R11.1 R12.1 R13.1 R14.1 R15.1 R16.1 R17.1 R20.2 R21.1 R22.1 R23.1 Regulator1.3 Reset1.1 Reset2.1 Right.1 SONAR1.1 SONAR2.1 SONAR3.1 USB.4 XBEE.10 XMEGA.3 XMEGA.13 XMEGA.23 XMEGA.33 XMEGA.43 XMEGA.53 XMEGA.63 XMEGA.73 XMEGA.84 XMEGA.93 | length 9718.4
  Top Layer w10: 24V.6@554.45,1999.33 24V.6 ; 5V.1 2290.55,1249.45 ; LVL_SHIFT1.11 2604.84,2310.16 v1(2605,2310) ; LVL_SHIFT1.22 2809.57,2304.57 v1(2820,2315) 2835.16,2330.16 LVL_SHIFT1.2 ; 2820,4156.5 XBEE.10 ; v1(3000,3415) C29.2 ; XMEGA.13 3110,3135 3120,3145 v1(3195,3145) ; XMEGA.3 3153.15,3331.85 v4(3190,3295) ; XMEGA.23@3045.53,2940.93 3095.93,2940.93 3115,2960 3115,2990 3140,3015 v1(3200,3015) ; 3159.84,2330.16 LVL_SHIFT2.11 ; XMEGA.33 3241.57,2956.57 v1(3270,2985) ; XMEGA.93 3241.57,3373.43 3290,3325 v1(3290,3285) ; v1(3355,3285) 3355,3310 3418.74,3373.74 XMEGA.84 ; v1@3375,3515 3402.56,3515 C31.2 ; LVL_SHIFT2.2 3390.16,2329.84 v1(3405,2315) ; v1(3415,2985) 3438.43,2961.57 XMEGA.43 ; v1(3480,3135) XMEGA.63 ; v1(3480,3265) 3510,3265 3576.85,3331.85 XMEGA.73 ; v1(3485,3020) 3490,3020 3525,2985 3525,2970 3554.07,2940.93 3634.47,2940.93 XMEGA.53 ; LVL_SHIFT3.10 LVL_SHIFT3.9 ; MAX202E.15 v1(4730,2490) ; v1(4945,1595) 4945,1523.89 4962.73,1506.16 4962.73,1436.88 FTDI.18 ; FTDI.21 5047.2,1492.2 5055,1500 v1(5160,1500) 5149.57,1489.57 FTDI.25 FTDI.26 ; FTDI.7 5072.8,1642.2 v1(5085,1630) ; Reset2.1@5257.44,4752.56 Reset2.1@5260,4750
  Top Layer w20: R17.1@2182.56,2550 R17.1 ; v1@2257.87,1192.13 5V.1 ; 2290.55,1249.45 2322.56,1217.44 C19.2 ; C18.2@2392.44,1365 v1(2445,1365) ; v1(2515,2370) 2518.19,2373.19 LVL_SHIFT1.12 ; LVL_SHIFT1.13 LVL_SHIFT1.12 ; LVL_SHIFT1.4 LVL_SHIFT1.5 LVL_SHIFT1.6 LVL_SHIFT1.7 LVL_SHIFT1.8 LVL_SHIFT1.9 LVL_SHIFT1.10 LVL_SHIFT1.11 LVL_SHIFT1.12 ; v1(2820,4125) 2820,4156.5 ; LVL_SHIFT2.13 3134.25,2264.25 v1(3180,2310) 3159.84,2330.16 ; LVL_SHIFT2.12 LVL_SHIFT2.11 ; LVL_SHIFT2.22 3364.57,2274.57 v1(3405,2315) ; LVL_SHIFT3.13 LVL_SHIFT3.12 LVL_SHIFT3.7 ; v1(3745,2300) LVL_SHIFT3.11@3745,2358.03 ; ESTOP.1 3870,4080 v1(3895,4105) 3895,4174.88 R16.1 ; v1(3920,2270) 3949.57,2240.43 LVL_SHIFT3.22 ; C1.1@4497.56,4745 v1(4555,4745) Reset1.1@4629.17,4745 ; v1(4660.12,1720.12) R11.1 R12.1 R13.1 R14.1 R15.1 R10.1 ; Reset1.1@4997.56,4750 v1(5145,4750) Reset2.1@5260,4750 ; R20.2 5200.12,2130 v1(5215,2130) ; v1(5685,3100) R22.1@5742.56,3100 ; v1(5690,1400) R21.1@5690,1442.44
  Top Layer w25: Kill.3@385,1460 385,1421.06 v5@400,1436.06 ; Kill.3@455.16,1464.84 480,1440
  Top Layer w40: Regulator1.3 1945,2700 2095,2550 R17.1@2182.56,2550 ; R17.1 2280,2457.44 R8.1
  Top Layer w100: v5(400,1395) v5@433.78,1428.78
  Bottom Layer w10: v1(2605,2310) 2617.56,2310 C3.1 ; v1(2820,2315) 2820,2288.84 2825,2283.84 C2.1 ; C16.1@3147.44,3295 v4(3190,3295) ; C17.1@3152.44,3145 v1(3195,3145) ; C8.1@3157.56,3015 v1(3200,3015) ; C5.1 C5.1@3210,2280 ; C9.1@3270,2942.44 v1(3270,2985) ; v1(3290,3285) C15.1@3290,3327.56 ; v1(3355,3285) C14.1@3355,3327.56 ; v1@3405,2312.56 v1(3405,2315) ; C10.1@3415,2942.44 v1(3415,2985) ; v1(3480,3135) C12.1@3527.56,3135 ; v1(3480,3265) C13.1@3527.56,3265 ; v1(3485,3020) C11.1@3527.56,3020 ; C7.1@3777.44,2267.56 C7.1 ; v1(3920,2270) v1@3927.56,2277.56 ; C28.2 4530,2545 v1@4535,2540 ; C24.2 v1@4727.44,2487.44 ; C21.1 4887.44,1595 v1(4945,1595) 5002.56,1595 C23.1 ; v1(5085,1630) 5085,1627.56 C22.1
  Bottom Layer w20: v1(3180,2310) C5.1@3210,2280 ; C4.1 v1@3405,2312.56 ; v1(3745,2300) C7.1@3777.44,2267.56 ; v1@3927.56,2277.56 C6.1 ; v1(6040,3440) R23.1
  Bottom Layer w100: v5(400,1395) 400,1844.88 24V.6 905,2349.88 905,2660 1168.07,2923.07 GND_12V.4
  other v1: 2260,1190 4530,2540 3370,3510
GPS_RX1: MAX202E.12 XMEGA.31 | length 1746
  Top Layer w10: XMEGA.31 3203.5,2836.46 3203.5,2776.5 v1(3240,2740) ; v1(4580,2315) MAX202E.12
  Bottom Layer w10: v1(3240,2740) 3250,2730 3440,2730 3476,2694 3495.75,2694 3496.75,2693 3579.77,2693 3580.27,2693.5 3599.73,2693.5 3600.23,2693 3624.77,2693 3625.27,2693.5 3662.66,2693.5 3801.16,2555 3935,2555 4205,2285 4550,2285 v1(4580,2315)
GPS_RX2: MAX202E.9 XMEGA.51 | length 1105.3
  Top Layer w10: XMEGA.51 3896.22,2898.78 4000,2795 4000,2610 v1(4185,2425) ; v1(4395,2425) 4410.87,2425 MAX202E.9
  Bottom Layer w10: v1(4185,2425) v1(4395,2425)
GPS_TX1: MAX202E.11 XMEGA.32 | length 1630.8
  Top Layer w10: XMEGA.32 3221.89,2783.11 3235,2770 v1(3255,2770) ; v1(4525,2335) MAX202E.11@4525,2400.87
  Bottom Layer w10: v1(3255,2770) 3275,2750 3445,2750 3485,2710 3502.37,2710 3503.37,2709 3573.14,2709 3573.64,2709.5 3606.36,2709.5 3606.86,2709 3618.14,2709 3618.64,2709.5 3671.5,2709.5 3796,2585 3945,2585 4220,2310 4500,2310 v1(4525,2335)
GPS_TX2: MAX202E.10 XMEGA.52 | length 1222.9
  Top Layer w10: XMEGA.52 3926.54,2918.46 4040,2805 4040,2605 v1@4190,2455 ; v1(4445,2485) 4480,2450 MAX202E.10
  Bottom Layer w10: v1@4190,2455 4360,2455 4390,2485 v1(4445,2485)
  other v1: 4190,2460
IND1: LVL_SHIFT2.10 XMEGA.27 | length 597.4
  Top Layer w10: v1(3065,2740) 3035,2710 3035,2625 3185.43,2474.57 LVL_SHIFT2.10 ; XMEGA.27 3123.46,2791.54 3130,2785 v1(3130,2765)
  Bottom Layer w10: v1(3065,2740) 3090,2765 v1(3130,2765)
IND2: LVL_SHIFT1.3 XMEGA.37 | length 951.5
  Top Layer w10: LVL_SHIFT1.3 2817.27,2380.89 2817.27,2406.19 2911.08,2500 v1@3130,2500 ; v1(3290,2545) 3320,2545 3340,2565 3340,2745 3320.32,2764.68 XMEGA.37
  Bottom Layer w10: v1@3130,2500 3131.16,2500 3203.5,2572.34 3203.5,2573.5 3215,2585 3255,2585 v1@3295,2545 ; v1(3290,2545) v1@3295,2550
  other v1: 3120,2500
INDEX1: ENCODER1.5 LVL_SHIFT2.14 | length 725.3
  Top Layer w10: ENCODER1.5 2909.96,1779.96 3159.84,2029.84 LVL_SHIFT2.14
INDEX2: ENCODER2.5 LVL_SHIFT1.21 | length 1133.2
  Top Layer w10: ENCODER2.5 2605.04,1169.96 2560,1215 2560,1887.06 2776.28,2103.33 2776.28,2139.11 LVL_SHIFT1.21
LEFT_INA: Left.5 Left.6 XMEGA.59 | length 2583.3
  Top Layer w10: XMEGA.59 4011.26,3056.26 v1(4020,3065) ; v1(4965,3350) v1@5535,3350
  Bottom Layer w10: v1(4020,3065) 4020,3075 4295,3350 v1(4965,3350) ; v1(5545,3350) 5600,3350 Left.6@5885,3635 ; Left.6 Left.5
LEFT_INB: Left.10 Left.11 XMEGA.60 | length 2527.3
  Top Layer w10: XMEGA.60 3960.94,3075.94 v1(3995,3110) ; v1(4935,3385) 5670,3385 5820,3235 5885,3235 Left.11@5885,3135
  Bottom Layer w10: v1@4002.5,3117.5 4270,3385 v1(4935,3385)
LEFT_PWM: Left.7 Left.12 R22.2 XMEGA.46 | length 3188.8
  Top Layer w10: XMEGA.46 3497.48,2772.52 3520,2750 v1(3560,2750) ; v1(4820,2965) 4920,3065 5722.44,3065 R22.2 ; R22.2@5748.72,3038.72 5752.44,3035 Left.12@5885,3035
  Bottom Layer w10: v1(3560,2750) 3617,2750 3623.5,2756.5 ; 3625,2755 3623.5,2756.5 ; v1(4820,2965) 4370,2965 4161.5,2756.5 3623.5,2756.5 ; Left.12 5995,3145 5995,3435 Left.7
M_RESET: Compass2.1 XMEGA.19 | length 1570.9
  Top Layer w10: Compass2.1 2365,4040 2365,3960 2510,3815 2510,3130 2623.11,3016.89 XMEGA.19
MISO: Compass2.3 XMEGA.21 | length 1735.9
  Top Layer w10: Compass2.3 2247.52,4000 2275,4000 2290,3985 2290,3905 2320,3875 2370,3875 2465,3780 2465,3110 2597.48,2977.52 XMEGA.21
MOSI: Compass2.2 XMEGA.20 | length 1638.9
  Top Layer w10: Compass2.2@2255,4055 2315,3995 2315,3965 2490,3790 2490,3115 2607.8,2997.2 XMEGA.20
NC: JTAG.7 JTAG.8
Net24V_5: 24V.5 Flyback.1 Kill.2 | length 1437.4
  Top Layer w10: Kill.2 Kill.2@755,1645
  Top Layer w100: Flyback.1 525.91,1215.91 670,1360 Kill.2 ; 24V.5 755,2140.91 Kill.2@755,1645
NetC20_2: C20.2 FTDI.2 | length 122.5
  Top Layer w10: FTDI.2 5200.75,1644.25 v1(5210,1635)
  Bottom Layer w10: v1(5210,1635) 5235,1610 C20.2
NetC21_2: C21.2 FTDI.17 | length 137.5
  Top Layer w10: v1(4930,1495) 4944.84,1480.16 FTDI.17
  Bottom Layer w10: C21.2 4917.44,1495 v1(4930,1495)
NetC25_1: C25.1 MAX202E.1 | length 118.8
  Top Layer w10: MAX202E.1 4780,2770 v1(4820,2810)
  Bottom Layer w10: C25.1 4820,2827.56 v1(4820,2810)
NetC25_2: C25.2 MAX202E.3 | length 133.7
  Top Layer w10: MAX202E.3 4680,2830 v1(4690,2840)
  Bottom Layer w10: v1(4690,2840) 4705,2855 C25.2
NetC26_1: C26.1 MAX202E.2 | length 146.6
  Top Layer w10: v1(4730,2670) MAX202E.2
  Bottom Layer w10: C26.1 v1(4730,2670)
NetC27_1: C27.1 MAX202E.4 | length 133.3
  Top Layer w10: MAX202E.4 v1(4630,2845)
  Bottom Layer w10: v1(4630,2845) C27.1@4630,2897.44
NetC27_2: C27.2 MAX202E.5 | length 128.4
  Top Layer w10: MAX202E.5 v1@4580,2840
  Bottom Layer w10: v1(4575,2845) C27.2@4575,2897.56
NetC28_1: C28.1 MAX202E.6 | length 131.6
  Top Layer w10: v1(4530,2690) MAX202E.6
  Bottom Layer w10: C28.1 v1(4530,2690)
NetCompass1_2: Compass1.2 F1.2 | length 155.3
  Bottom Layer w10: Compass1.2 2221.57,3757.17 F1.2
NetD2_2: D2.2 R11.2 | length 139.9
  Top Layer w10: D2.2 R11.2
NetD3_2: D3.2 R12.2 | length 139.9
  Top Layer w10: D3.2 R12.2
NetD4_2: D4.2 R13.2 | length 139.9
  Top Layer w10: D4.2 R13.2
NetD5_2: D5.2 R14.2 | length 139.9
  Top Layer w10: D5.2 R14.2
NetD6_2: D6.2 R15.2 | length 139.9
  Top Layer w10: D6.2 R15.2
NetENCODER1_2: ENCODER1.2 F5.2 | length 242.8
  Top Layer w10: ENCODER1.2 2797.83,1543.74 F5.2
NetENCODER2_2: ENCODER2.2 F6.2 | length 147.2
  Top Layer w10: ENCODER2.2@2652.83,936.57 F6.2
NetF2_2: F2.2 SONAR1.2 | length 190.9
  Top Layer w10: SONAR1.2 3837.17,1576.57 F2.2
NetF3_2: F3.2 SONAR2.2 | length 150.9
  Top Layer w10: SONAR2.2 3267.17,931.57 F3.2
NetF4_2: F4.2 SONAR3.2 | length 155.9
  Top Layer w10: SONAR3.2 3262.17,1571.57 F4.2
NetFTDI_22: FTDI.22 RX.2 | length 1371.7
  Top Layer w10: RX.2 4955,1915 4995,1875 5330,1875 5370,1835 5370,1395 5305,1330 5115,1330 5072.8,1372.2 FTDI.22
NetFTDI_23: FTDI.23 TX.2 | length 1393.5
  Top Layer w10: TX.2 4925,2050 4925,1915 4985,1855 5320,1855 5350,1825 5350,1405 5300,1355 5120,1355 5098.39,1376.61 FTDI.23
NetPOWER_2: POWER.2 R10.2 | length 139.9
  Top Layer w10: POWER.2 R10.2
NetR16_2: R16.2 XBEEL.2 | length 89.9
  Top Layer w10: R16.2 XBEEL.2
NetR17_2: R17.2 Regulator1.2 | length 364.7
  Top Layer w10: Regulator1.2 2045,2655 2137.56,2655 R17.2
NetR18_1: R18.1 TX.1 | length 104.9
  Top Layer w10: TX.1 R18.1
NetR19_1: R19.1 RX.1 | length 104.9
  Top Layer w10: RX.1 R19.1
NetR20_1: R20.1 USB1.2 | length 104.9
  Top Layer w10: USB1.2 R20.1
NetXBEE_15: XBEE.15 XBEEL.1 | length 260
  Top Layer w10: XBEE.15@3709.68,4495 XBEE.15 3838.7,4491.3 XBEEL.1
RESET: C1.2 C20.1 JTAG.6 R1.1 Reset1.3 Reset2.2 XMEGA.90 | length 7281.2
  Top Layer w10: JTAG.6 2650,3445 2825,3445 3015,3635 v1(3510,3635) 3490,3615 3490,3525 3450,3485 3320,3485 3313.68,3478.68 3313.31,3478.68 3303.41,3468.77 3303.41,3435.02 XMEGA.90 3300.63,3470.63 ; v1(3945,3795) 4090,3940 4090,4200 4380,4490 4407.56,4490 R1.1 ; C1.2 4437.44,4697.56 4497.56,4637.44 R1.1 ; Reset2.2 5161.26,4666.26 5070,4575 4995,4575 4636.73,4575 4631.73,4580 R1.1
  Bottom Layer w10: v1(3510,3635) 3615,3635 3685,3705 3785,3705 3875,3795 v1(3945,3795) ; C20.1 5307.44,1537.44 5450,1680 5450,2120 5265,2305 Reset2.2
RIGHT_INA: Right.5 Right.6 XMEGA.57 | length 3574
  Top Layer w10: XMEGA.57 3940,3016.89 3971.89,2985 v1(3985,2985) ; v1(4975,2965) 5535,2965 5980,2520 5980,1755 5885,1660
  Bottom Layer w10: v1(3985,2985) 4032.63,2985 4064.13,3016.5 4923.5,3016.5 v1(4975,2965) ; 5885,1560 5885,1660
RIGHT_INB: Right.10 Right.11 XMEGA.58 | length 4234.4
  Top Layer w10: XMEGA.58 3993.43,3036.57 v1(4010,3020) ; v1(4970,3035) 5545,3035 6060,2520 v1(6060,1260)
  Bottom Layer w10: v1(4010,3020) 4045,3020 4060,3035 v1(4970,3035) ; 5885,1060 5885,1160 5950,1225 6040,1225 6060,1245 v1(6060,1260)
RIGHT_PWM: R21.2 Right.7 Right.12 XMEGA.45 | length 3808.9
  Top Layer w10: XMEGA.45 3477.8,2757.2 v1@3495,2740 ; v1(4375,2335) 4490,2220 5310,2220 5425,2105 5425,1762.56 R21.2 5842.44,1502.56 5985,1360 5985,1060 5885,960
  Bottom Layer w10: v1@3495,2740 v1(3496,2739) 3510,2725 3566.51,2725 3567.01,2725.5 3694.5,2725.5 3815,2605 3955,2605 4225,2335 v1(4375,2335)
SCK: Compass2.4 XMEGA.22 | length 1845.8
  Top Layer w10: Compass2.4@2113.78,4031.22 Compass2.4 2128.78,4040 2128.78,3936.22 2185,3880 2280,3880 2320,3840 2355,3840 2440,3755 2440,3110 2592.17,2957.83 XMEGA.22
SRXD1: GPS1.2 MAX202E.13 | length 1030.8
  Top Layer w10: MAX202E.13 4630,2325 4655,2300 5105,2300 5295,2490 5295,2575 5268.74,2601.26 GPS1.2
SRXD2: GPS2.2 MAX202E.8 | length 1635.7
  Top Layer w10: MAX202E.8 4430,2850 4495,2915 5445,2915 5625,2735 5625,2665 5568.74,2608.74 GPS2.2
SSNOT: Compass1.3 XMEGA.72 | length 2220.4
  Top Layer w10: v1(2550,3720) 2601,3669 2765,3669 2774,3660 3730,3660 ; XMEGA.72 3852.17,3312.17 ; 3731,3659 3935,3455 3935,3348 3898.17,3311.17 3853.17,3311.17
  Bottom Layer w10: Compass1.3 2347.48,3710 2400,3710 2430,3740 2530,3740 v1(2550,3720)
STXD1: GPS1.3 MAX202E.14 | length 656
  Top Layer w10: MAX202E.14 4680,2355 4705,2330 5002.48,2330 GPS1.3
STXD2: GPS2.3 MAX202E.7 | length 1149.6
  Top Layer w10: MAX202E.7 4480,2820 4545,2885 5267.48,2885 GPS2.3
TCK: JTAG.1 R2.1 XMEGA.11 | length 348.1
  Top Layer w10: JTAG.1@2697.56,3170 R2.1@2790,3170 ; R2.1 2972.44,3167.44 2979.37,3174.37 XMEGA.11
TDI: JTAG.9 R5.1 XMEGA.10 | length 753.1
  Top Layer w10: JTAG.9 R5.1@2787.44,3590 ; v1(2835,3215) 2845,3215 2865.94,3194.06 XMEGA.10
  Bottom Layer w10: JTAG.9@2710,3575 JTAG.9 2695,3555 2835,3415 v1@2835,3225
TDO: JTAG.3 R3.1 XMEGA.12 | length 667.9
  Top Layer w10: JTAG.3 2640,3235 2640,3166.39 2665.69,3140.69 2968.32,3140.69 2982.31,3154.69 XMEGA.12
  Bottom Layer w10: JTAG.3 2712.56,3272.44 R3.1
TMS: JTAG.5 R4.1 XMEGA.9 | length 534.1
  Top Layer w10: JTAG.5@2697.44,3387.56 R4.1 2837.44,3387.56 2855,3370 2855,3235 2876.26,3213.74 XMEGA.9 3039.98,3216.52 3006.23,3216.52
TR1: LVL_SHIFT3.3 XMEGA.30 | length 1043.3
  Top Layer w10: XMEGA.30@3185,2835.28 3185,2740 v1(3205,2720) ; v1@3380,2690 3450,2620 v1@3600,2620 ; LVL_SHIFT3.3 v1(3949.57,2434.57) v1@3950,2435
  Bottom Layer w10: v1(3205,2720) 3231.5,2693.5 3254.73,2693.5 3258.23,2690 v1@3380,2690 ; v1@3620,2620 3640,2620 3810,2450 3934.13,2450 v1(3949.57,2434.57)
  other v1: 3610,2620 3385,2685
TR2: LVL_SHIFT3.4 XMEGA.40 | length 879.9
  Top Layer w10: XMEGA.40 3379.37,2725.63 3409,2696 3409,2692.77 3456.77,2645 3660,2645 v1(3810,2495) ; LVL_SHIFT3.4 v1(3923.98,2476.02)
  Bottom Layer w10: v1(3810,2495) 3811.89,2493.11 3906.89,2493.11 v1(3923.98,2476.02)
TR3: LVL_SHIFT3.5 XMEGA.50 | length 684.5
  Top Layer w10: XMEGA.50 3635,2778.98 v1(3635,2670) ; v1(3895,2520) 3898.39,2516.61 LVL_SHIFT3.5
  Bottom Layer w10: v1(3635,2670) 3660,2670 3795,2535 3875,2535 3895,2515 v1(3895,2520)
TRIG1: LVL_SHIFT3.21 SONAR1.4 | length 432.4
  Top Layer w10: SONAR1.4 3835,1772.05 3923.98,1861.02 LVL_SHIFT3.21
TRIG2: LVL_SHIFT3.20 SONAR2.4 | length 1387
  Top Layer w10: LVL_SHIFT3.20 3898.39,1876.61 v1(3900,1875)
  Bottom Layer w10: SONAR2.4 3273.78,1100 3415,1100 3765,1450 3765,1740 v1(3900,1875)
TRIG3: LVL_SHIFT3.19 SONAR3.4 | length 919.7
  Top Layer w10: v1(3870,1890) 3872.8,1892.8 LVL_SHIFT3.19
  Bottom Layer w10: SONAR3.4 3261.22,1730 3710,1730 v1(3870,1890)
USB_5V: C22.2 C23.2 FTDI.19 FTDI.20 R18.2 R19.2 USB1.1 USB.1 | length 1309.2
  Top Layer w10: USB1.1 4955,2137.56 4962.56,2130 5132.56,2130 R18.2@5170.12,2092.44 ; v1(5000,1495) 4996.02,1491.02 FTDI.19 FTDI.20 5021.61,1383.39 5114.21,1290.79 USB.1 ; R18.2 R19.2 5180,1990.12 v1(5180,1950)
  Bottom Layer w10: v1(5000,1495) 5000,1532.44 C23.2 C22.2 5132.44,1537.44 5180,1585 v1(5180,1950)
USB_D+: FTDI.15 USB.3 | length 312.6
  Top Layer w10: FTDI.15 4893.66,1289.33 USB.3
USB_D-: FTDI.16 USB.2 | length 223.2
  Top Layer w10: FTDI.16 4919.25,1342.48 USB.2
USB_RX: FTDI.5 XMEGA.18 | length 4386.5
  Top Layer w10: v1(2940,3060) 2960.65,3039.35 3039.98,3039.35 XMEGA.18 ; FTDI.5 v1(5123.98,1763.98)
  Bottom Layer w10: v1(2940,3060) 2940,3450 2995,3505 3055,3505 3085,3535 4835,3535 5010,3360 5010,1877.95 v1(5123.98,1763.98)
USB_TX: FTDI.1 XMEGA.17 | length 4523.7
  Top Layer w10: v1(2915,3115) 2930,3100 2945,3100 2988.74,3056.26 XMEGA.17 ; v1(5100,1830) 5135,1795 5190,1795 5226.34,1758.66 FTDI.1
  Bottom Layer w10: v1(2915,3115) 2915,3460 2985,3530 3025,3530 3055,3560 4855,3560 5040,3375 5040,1890 v1(5100,1830)
WIRELESSKILL: Kill.1 LVL_SHIFT3.18 Solenoid1.2 Solenoid.2 | length 2398.5
  Top Layer w10: Kill.1@385.16,1650.16 Kill.1 ; v1(3847.2,1982.2) LVL_SHIFT3.18
  Top Layer w25: Kill.1@385.16,1650.16 215,1480 215,1145 486.26,873.74 Solenoid1.2
  Bottom Layer w10: Solenoid.2 3940,1118.74 3940,1889.41 v1(3847.2,1982.2)
WKILL: LVL_SHIFT3.6 XMEGA.55 | length 791.5
  Top Layer w10: XMEGA.55 3747.48,2977.52 v1(3775,2950) ; LVL_SHIFT3.6 3871.5,2359.48 3871.5,2860.91 v1@3872.8,2862.2
  Bottom Layer w10: v1(3775,2950) 3865,2860 v1(3875,2860)
XTAL1: C29.1 OSC.1 XMEGA.92 | length 374.3
  Top Layer w10: C29.1 3017.56,3512.56 OSC.1 3142.25,3585 3258.48,3468.77 3258.48,3435.02 XMEGA.92
XTAL2: C31.1 OSC.2 XMEGA.91 | length 277.9
  Top Layer w10: XMEGA.91 3280.94,3559.41 OSC.2 3309.09,3587.56 C31.1
pads on no net: Extra.2 Extra.4 Extra.8 Extra.9 Extra.13 FTDI.3 FTDI.6 FTDI.8 FTDI.9 FTDI.10 FTDI.11 FTDI.12 FTDI.13 FTDI.14 FTDI.24 FTDI.27 FTDI.28 Left.2 Left.4 Left.8 Left.9 Left.13 LVL_SHIFT1.14 LVL_SHIFT1.15 LVL_SHIFT1.16 LVL_SHIFT1.17 LVL_SHIFT1.18 LVL_SHIFT1.19 LVL_SHIFT1.20 LVL_SHIFT1.23 LVL_SHIFT2.23 LVL_SHIFT3.14 LVL_SHIFT3.15 LVL_SHIFT3.16 LVL_SHIFT3.17 LVL_SHIFT3.23 Regulator1.5 Right.2 Right.4 Right.8 Right.9 Right.13 Solenoid1.1 Solenoid.1 USB.5 USB.6 XBEE.4 XBEE.5 XBEE.6 XBEE.7 XBEE.8 XBEE.9 XBEE.11 XBEE.12 XBEE.13 XBEE.14 XBEE.16 XBEE.17 XBEE.18 XBEE.19 XBEE.20 XMEGA.1 XMEGA.2 XMEGA.5 XMEGA.6 XMEGA.7 XMEGA.8 XMEGA.15 XMEGA.16 XMEGA.28 XMEGA.38 XMEGA.48 XMEGA.70 XMEGA.75 XMEGA.76 XMEGA.77 XMEGA.78 XMEGA.79 XMEGA.80 XMEGA.81 XMEGA.82 XMEGA.85 XMEGA.86 XMEGA.87 XMEGA.88 XMEGA.89 XMEGA.96 XMEGA.97 XMEGA.98 XMEGA.99 XMEGA.100
copper on no net:
  other v2: 90,805 830,805 1145,805 4070,805 6360,805 2695,2695 105,3925 610,3925 1125,4860 3975,4860 6380,4860

## Polygon pours and split planes (outlines as drawn)
24V on Top Layer "24V" (solid, remove dead copper, pour order 2): 673.23,3688.22 655,3670 185,3670 185,1885 205,1865 355,1870 365,2170 365,2500 670,2495 660,2735 665,3035
GND on Top Layer "GND" (solid, remove dead copper, pour order 14): 1615,2480 1095,2480 1095,3675 1085,3685 1095,3695 1605,3695
5V on Top Layer "5V" (solid, remove dead copper, pour order 6): 4100,2180 4100,680 1815,680 1815,1695 2470,1695 2485,1710 2485,2170
12V on Top Layer "12V" (solid, remove dead copper, pour order 4): 1095,2375 1605,2375 1605,1885 1100,1885 1095,1890
3.3V on 3.3V (split plane): 6509.9,4958.73 6509.9,670.1 20.1,670.1 20.1,4971.89
GND on GND (split plane): 6509.9,4958.73 6509.9,670.1 20.1,670.1 20.1,4971.89

## Keep-outs
Keep-Out Layer:
  lines w10: 10,625 0,635 0,5020 25,4995 6545,4995 6545,635 6545,625 70,625

## Silkscreen, mask and mechanical layers (free items; w line width, h text height)
Top Overlay:
  drawing of 42 lines, arcs and shapes, not listed
  text "InstiGator" at 1330,4870 h60
  text "Main Board v1.0" at 1335,4770 h60
  text "Andrew Wegener" at 1330,4675 h60
  text "MIL 2012" at 1325,4580 h60
  text "+" at 3460,3580 h20
  text "+" at 2950,3500 h20
  text "+" at 1110,1455 h60 r90
Bottom Overlay:
  drawing of 168 lines, arcs and shapes, not listed
  text "+" at 4635,2935 h20
  text "+" at 4795,2890 h20
  text "+" at 4680,2610 h20
  text "+" at 4570,2570 h20
  text "+" at 4815,2280 h20

## Text inside footprints (layer, text, board x,y; h text height)
JTAG: Top Overlay "1" at 2715,3110 h50 r90
USB: Mechanical 1 "PCB Edge" at 4842.5,667.8 h9.84